# Allegro board RPI-PICO-R3a-PUBLIC.brd
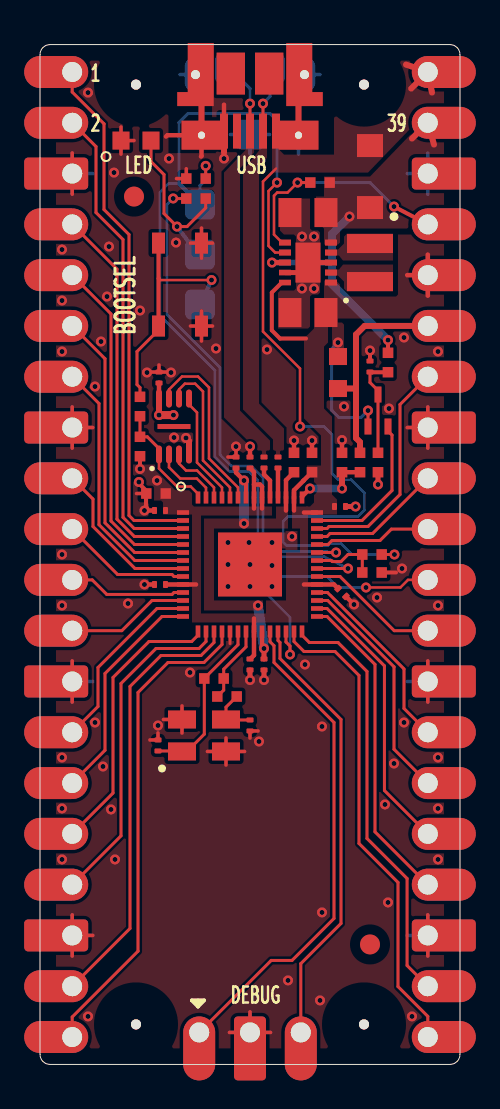
[diagram p0: board, top side]
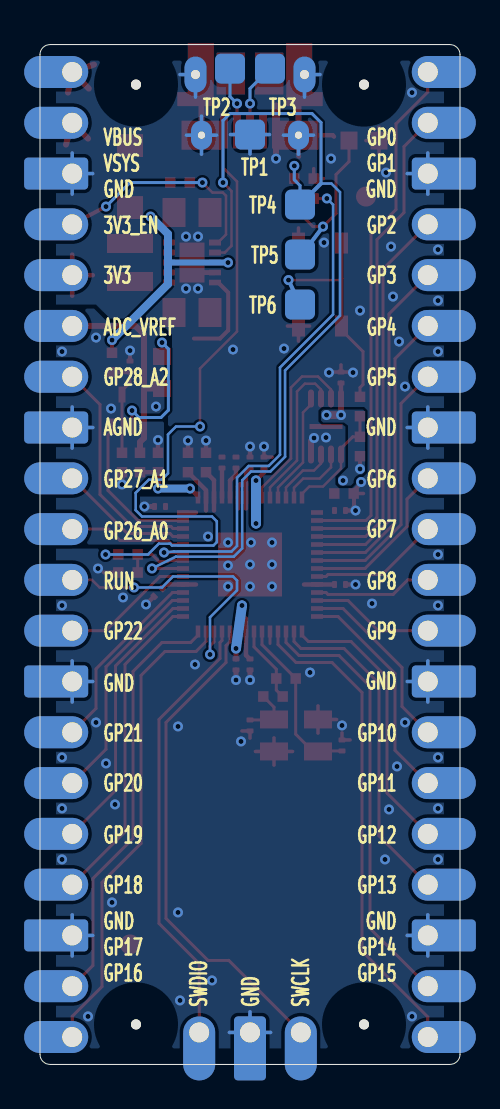
[diagram p1: board, bottom side, seen from below]

Outline 21 x 51 mm; copper layers: TOP, BOTTOM. Coordinates in mm from the lower left corner of the outline.
Outline path: 0,50.5 0,0.5 arc(0.15,0.15) 0.5,0 20.5,0 arc(20.85,0.15) 21,0.5 21,50.5 arc(20.85,50.85) 20.5,51 0.5,51 arc(0.15,50.85) 0,50.5

## Design rules (mm)
constraint set DEFAULT: min track width 0.127

## Placement (name value [footprint] x y rotation side)
C1  47u  [CAPC2012]  13.4 42.6 180 top
C2  47u  [CAPC2012]  13.4 37.6 180 top
C3  1n  [M0603_PICO]  16.5 34.9 90 top
C4  100n  [M0603_PICO]  6 27.7 180 top
C5  100n  [M0603_PICO]  6 24 180 top
C6  100n  [M0603_PICO]  15.1 23.6 315 top
C7  100n  [M0603_PICO]  15 27.9 0 top
C8  100n  [M0603_PICO]  10.5 20 270 top
C9  100n  [M0603_PICO]  11.2 20 270 top
C10  100n  [M0603_PICO]  10.5 30.1 90 top
C11  100n  [M0603_PICO]  9.8 30.1 90 top
C12  2u2  [CAPC1005]  12.7 30.1 90 top
C13  2u2  [CAPC1005]  15.1 30.1 90 top
C14  2u2  [CAPC1005]  13.6 30.1 90 top
C15  100n  [M0603_PICO]  5.95 34.35 90 top
C16  15p  [M0603_PICO]  5.9 15.95 90 top
C17  15p  [M0603_PICO]  10.5 16.95 270 top
C18  2u2  [CAPC1005]  5.8 28.55 180 top
D1  MBR120VLSFT1G  [SOD123FL]  16.5 44.4 90 top
D2  Green  [AVAGO_QSM]  4.8 46.2 0 top
J0  -  [CON_PICO_40W]  10.5 25.5 0 top
J1  690-005-298-486  [FCI_10103594-0001LF]  10.5 49.5 180 top
J2  -  [CON_PICO_3W]  10.5 1.6 0 top
L1  2u2  [BOURNS_SRN2512]  16.5 40.1 270 top
NOREF  -  []  1.61 1.37 90 top
NOREF#2  -  []  10.5 0 90 top
NOREF#3  -  []  12.9 51 90 top
NOREF#4  -  []  2.32 7.21 0 top
NOREF#5  -  [unnamed#2]  16.2 49 0 top
NOREF#6  -  []  10.5 0 90 top
NOREF#7  -  []  0 0 90 top
NOREF#8  -  []  1.61 49.63 0 top
NOREF#9  -  [unnamed#2]  4.8 2 0 top
NOREF#10  -  [unnamed#2]  16.2 2 0 top
NOREF#11  -  []  2.21 14.6 0 top
NOREF#12  -  []  -0.79 3.11 90 top
NOREF#13  -  []  -0.79 0.57 0 top
NOREF#14  -  []  -0.79 0.57 0 top
NOREF#15  -  []  64 31 0 top
NOREF#16  -  []  0 50.5 0 top
NOREF#17  -  []  -0.79 0.57 90 top
NOREF#18  -  []  65 0 0 top
NOREF#19  -  []  -0.79 2.17 90 top
NOREF#20  -  [unnamed#3]  4.7 43.4 0.1 top
NOREF#21  -  []  7.16 1.57 0 top
NOREF#22  -  []  -15 87 0 top
NOREF#23  -  []  14.3 2 0 top
NOREF#24  -  []  15.2 49 90 top
NOREF#25  -  [unnamed#2]  4.8 49 0 top
NOREF#26  -  []  7.16 -0.8 90 top
NOREF#27  -  []  19.89 34.39 0 top
NOREF#28  -  [unnamed#3]  16.5 6 0.1 top
NOREF#29  -  []  0 1.35 0 top
NOREF#30  -  []  0.55 0 90 top
NOREF#31  -  []  16.2 3.05 0 top
NOREF#32  -  []  0 2 0 top
NOREF#33  -  []  19 18.35 90 top
NOREF#34  -  []  -15 139 0 top
NOREF#35  -  []  2.41 3.91 0 top
NOREF#36  -  []  21.49 39.47 0 top
NOREF#37  -  []  6.5 51.1 0 top
NOREF#38  -  []  4.8 0 0 top
NOREF#39  -  []  1.61 34.39 90 top
NOREF#40  -  []  4.8 49 0 top
Q1  DMG1012T  [SOT50P160X90-3N]  16.9 32.7 90 top
R1  10K  [RESC1005]  16.6 24.6 0 top
R2  100K  [RESC1005]  14 44.1 180 top
R3  470R  [RESC1005]  7.8 43.3 0 top
R4  NO-FIT  [RESC1005]  5 30.9 90 top
R5  200K  [RESC1005]  17.4 35.1 270 top
R6  100K  [RESC1005]  16.9 30.1 270 top
R7  200R  [RESC1608]  14.9 34.6 270 top
R8  100K  [RESC1005]  7.8 44.3 180 top
R9  1R  [RESC1005]  16 30.1 270 top
R10  5K6  [RESC1005]  16.6 25.5 180 top
R11  1K  [RESC1005]  5 32.9 270 top
R12  27R  [M0603_PICO]  11.2 30.1 270 top
R13  27R  [M0603_PICO]  11.9 30.1 270 top
R14  1K  [RESC1005]  9.35 18.4 0 top
R15  NO-FIT  [RESC1005]  8.7 19.3 0 top
SW1  TP-1221U-K9K5325  [TONEPARTS_TP-1221U-K9K5325]  7 39 90 top
TP1  SQ1P5MM  [TP_SMT_1P5X1P5MM]  10.5 46.5 180 bottom
TP2  SQ1P5MM  [TP_SMT_1P5X1P5MM]  11.5 49.8 180 bottom
TP3  SQ1P5MM  [TP_SMT_1P5X1P5MM]  9.5 49.8 180 bottom
TP4  SQ1P5MM  [TP_SMT_1P5X1P5MM]  8 43 180 bottom
TP5  SQ1P5MM  [TP_SMT_1P5X1P5MM]  8 40.5 180 bottom
TP6  SQ1P5MM  [TP_SMT_1P5X1P5MM]  8 38 180 bottom
U1  RP2040  [RPI_RP2040]  10.5 25 0 top
U2  RT6150B-33GQW  [RICHTEK_RT6150B]  13.4 40.1 180 top
U3  W25Q16JVUXIQ  [USON_2X3MM]  6.7 31.9 90 top
X1  12MHz  [XTAL320X250X100]  8.2 16.45 0 top

## Library data of the parts
C1-C18 = CAP_MLCC
D1 = DIODE_SCHOTTKY
D2 = LED_2PIN
J0 = CON_PICO_40W
J1 = CON_uUSB_B
J2 = CON_PICO_3W
L1 = INDUCTOR
Q1 = MOSFET_N
R1-R15 = RES_CHIP
SW1 = SW_PB_4PIN
TP1-TP6 = TP_SMT_SQUARERC_1P5MM
U1 = RPI_RP2040
U2 = RICHTEK_RT6150
U3 = WINBOND_W25X_QSPI_FLASH_USON
X1 = CRYSTAL_4P

## Footprints (pads in the part's own frame, mm; a bottom-side part is the same pattern mirrored in y, then rotated)
AVAGO_QSM
  rect 0.85x0.9 smd: 1(-0.75,0) 2(0.75,0)
BOURNS_SRN2512
  rect 0.95x2.3 smd: 1(-0.95,0) 2(0.95,0)
CAPC1005
  rect 0.52x0.53 smd: 1(-0.485,0) 2(0.485,0)
CAPC2012
  rect 1.15x1.45 smd: 1(-0.9,0) 2(0.9,0)
CON_PICO_3W
  oval 1.6x3.2 hole 1: 1(-2.54,0) 3(2.54,0)
  rrect 1.6x3.2 hole 1: 2(0,0)
CON_PICO_40W
  oval 3.2x1.6 hole 1: 1(-8.89,24.13) 2(-8.89,21.59) 4(-8.89,16.51) 5(-8.89,13.97) 6(-8.89,11.43) 7(-8.89,8.89) 9(-8.89,3.81) 10(-8.89,1.27) 11(-8.89,-1.27) 12(-8.89,-3.81) 14(-8.89,-8.89) 15(-8.89,-11.43) 16(-8.89,-13.97) 17(-8.89,-16.51) 19(-8.89,-21.59) 20(-8.89,-24.13) 21(8.89,-24.13) 22(8.89,-21.59) 24(8.89,-16.51) 25(8.89,-13.97) 26(8.89,-11.43) 27(8.89,-8.89) 29(8.89,-3.81) 30(8.89,-1.27) 31(8.89,1.27) 32(8.89,3.81) 34(8.89,8.89) 35(8.89,11.43) 36(8.89,13.97) 37(8.89,16.51) 39(8.89,21.59) 40(8.89,24.13)
  rrect 3.2x1.6 hole 1: 3(-8.89,19.05) 8(-8.89,6.35) 13(-8.89,-6.35) 18(-8.89,-19.05) 23(8.89,-19.05) 28(8.89,-6.35) 33(8.89,6.35) 38(8.89,19.05)
FCI_10103594-0001LF
  rect 1.42x2.1 smd: (-0.96,-0.05) (0.96,-0.05)
  rect 0.4x1.75 smd: 1(-1.3,2.825) 2(-0.65,2.825) 3(0,2.825) 4(0.65,2.825) 5(1.3,2.825)
  custom 2x1.45 hole 1.05x0.65: 6(-2.425,3.03) 8(2.425,3.03)
  custom 1.825x3.15 hole 0.7x1.4: 7(-2.725,0) 9(2.725,0)
M0603_PICO
  rrect 0.25x0.35 smd: 1(-0.275,0) 2(0.275,0)
RESC1005
  rect 0.52x0.53 smd: 1(-0.485,0) 2(0.485,0)
RESC1608
  rect 0.85x0.9 smd: 1(-0.8,0) 2(0.8,0)
RICHTEK_RT6150B
  rect 0.6x0.3 smd: 1(-1.15,1) 2(-1.15,0.5) 3(-1.15,0) 4(-1.15,-0.5) 5(-1.15,-1) 6(1.15,-1) 7(1.15,-0.5) 8(1.15,0)
  rect 0.6x0.28 smd: 9(1.15,0.5) 10(1.15,1)
  rect 1.25x2 smd: 11(0,0)
RPI_RP2040
  rect 0.6x0.23 smd: 1(-3.35,2.6) 2(-3.35,2.2) 3(-3.35,1.8) 4(-3.35,1.4) 5(-3.35,1) 6(-3.35,0.6) 7(-3.35,0.2) 8(-3.35,-0.2) 9(-3.35,-0.6) 10(-3.35,-1) 11(-3.35,-1.4) 12(-3.35,-1.8) 13(-3.35,-2.2) 14(-3.35,-2.6) 29(3.35,-2.6) 30(3.35,-2.2) 31(3.35,-1.8) 32(3.35,-1.4) 33(3.35,-1) 34(3.35,-0.6) 35(3.35,-0.2) 36(3.35,0.2) 37(3.35,0.6) 38(3.35,1) 39(3.35,1.4) 40(3.35,1.8) 41(3.35,2.2) 42(3.35,2.6)
  rect 0.23x0.6 smd: 15(-2.6,-3.35) 16(-2.2,-3.35) 17(-1.8,-3.35) 18(-1.4,-3.35) 19(-1,-3.35) 20(-0.6,-3.35) 21(-0.2,-3.35) 22(0.2,-3.35) 23(0.6,-3.35) 24(1,-3.35) 25(1.4,-3.35) 26(1.8,-3.35) 27(2.2,-3.35) 28(2.6,-3.35) 43(2.6,3.35) 44(2.2,3.35) 45(1.8,3.35) 46(1.4,3.35) 47(1,3.35) 48(0.6,3.35) 49(0.2,3.35) 50(-0.2,3.35) 51(-0.6,3.35) 52(-1,3.35) 53(-1.4,3.35) 54(-1.8,3.35) 55(-2.2,3.35) 56(-2.6,3.35)
  rect 3.2x3.2 smd: 57(0,0)
SOD123FL
  rect 1.15x1.3 smd: 1(-1.55,0) 2(1.55,0)
SOT50P160X90-3N
  rect 0.8x0.35 smd: 1(-0.8,0.5) 2(-0.8,-0.5) 3(0.8,0)
TONEPARTS_TP-1221U-K9K5325
  rect 1.05x0.65 smd: 1(-2.075,1.075) 2(2.075,1.075) 3(-2.075,-1.075) 4(2.075,-1.075)
TP_SMT_1P5X1P5MM
  rrect 1.5x1.5 smd: 1(0,0)
unnamed#2
  round 0.5 hole 2.1 unplated: (0,0)
unnamed#3
  round 1 smd: (0,0)
USON_2X3MM
  oval 0.9x0.3 smd: 1(-1.4,0.75) 2(-1.4,0.25) 3(-1.4,-0.25) 4(-1.4,-0.75) 5(1.4,-0.75) 6(1.4,-0.25) 7(1.4,0.25) 8(1.4,0.75)
  rect 0.25x1.65 smd: 9(0,0)
XTAL320X250X100
  rect 1.4x0.9 smd: 1(-1.1,-0.8) 2(1.1,-0.8) 3(1.1,0.8) 4(-1.1,0.8)

## Nets
1V1: C9.1 C11.1 C12.1 U1.23 U1.45 U1.50
3V3: C2.1 C4.1 C5.1 C6.1 C7.1 C8.1 C10.1 C14.1 C15.1 C18.1 J0.36 Q1.1 R4.1 R7.1 U1.1 U1.10 U1.22 U1.33 U1.42 U1.44 U1.48 U1.49 U2.1(VOUT) U2.10 U3.8
3V3_EN: J0.37 R2.2 U2.6
GND: C1.2 C2.2 C3.2 C4.2 C5.2 C6.2 C7.2 C8.2 C9.2 C10.2 C11.2 C12.2 C13.2 C14.2 C15.2 C16.2 C17.2 C18.2 D2.1(CATHODE) J0.3 J0.8 J0.13 J0.18 J0.23 J0.28 J0.33 J0.38 J1.5 J1.6 J1.7 J1.8 J1.9(SH4) J2.2 R1.2 R6.2 R8.2 SW1.3 SW1.4(P4) TP1.1 U1.19 U1.57 U2.3 U2.9 U2.11 U3.4 X1.2 X1.4(GND2)
VBUS: D1.2 J0.40 J1.1 R10.1
ADC_AVDD: C13.1 R9.2 U1.43
ADC_VREF: J0.35 R7.2 R9.1
GPIO0: J0.1 U1.2
GPIO1: J0.2 U1.3
GPIO2: J0.4 U1.4
GPIO3: J0.5 U1.5
GPIO4: J0.6 U1.6
GPIO5: J0.7 U1.7
GPIO6: J0.9(P9) U1.8
GPIO7: J0.10 U1.9
GPIO8: J0.11 U1.11
GPIO9: J0.12 U1.12
GPIO10: J0.14 U1.13
GPIO11: J0.15 U1.14
GPIO12: J0.16 U1.15
GPIO13: J0.17 U1.16
GPIO14: J0.19 U1.17
GPIO15: J0.20 U1.18
GPIO16: J0.21 U1.27
GPIO17: J0.22 U1.28
GPIO18: J0.24 U1.29
GPIO19: J0.25 U1.30
GPIO20: J0.26 U1.31
GPIO21: J0.27 U1.32
GPIO22: J0.29 U1.34
GPIO23: R8.1 TP4.1 U1.35 U2.7
GPIO24: R1.1 R10.2 U1.36
GPIO25: R3.1 U1.37
GPIO26_ADC0: J0.31 U1.38
GPIO27_ADC1: J0.32 U1.39
GPIO28_ADC2: J0.34 U1.40
GPIO29_ADC3: Q1.2(S) U1.41
QSPI_SCLK: U1.52 U3.6
QSPI_SD0: U1.53 U3.5
QSPI_SD1: U1.55 U3.2
QSPI_SD2: U1.54 U3.3(W\P\_IO2)
QSPI_SD3: U1.51 U3.7
QSPI_SS: R4.2 R11.2 U1.56 U3.1
RUN: J0.30 U1.26
SWCLK: J2.1 U1.24
SWDIO: J2.3(P3) U1.25
USB_DM: J1.2 R13.1 TP2.1
USB_DMX: R13.2 U1.46
USB_DP: J1.3 R12.1 TP3.1
USB_DPX: R12.2 U1.47
VSYS: C1.1 D1.1(K) J0.39 R2.1 R5.1 U2.5 U2.8
XIN: C16.1 R15.1 U1.20 X1.1
XOUT: R14.1 R15.2 U1.21(XOUT)
XR: C17.1 R14.2 X1.3
N1248345: L1.1 U2.4
N1248352: L1.2 U2.2
N1283798: D2.2 R3.2 TP5.1
N1286133: C3.1 Q1.3 R5.2 R6.1
N1327876: R11.1 SW1.1 SW1.2 TP6.1

Pads without a net: J1 4; U3 9

## Via types
v1: diameter 0.5, hole 0.25, TOP to BOTTOM, 111 vias

## Routing (per net, layer and track width the routed paths; a pad name or vN(x,y) marks a point on that pad's centre or on a via; arc(x,y) is an arc through that point)
1V1: length 9.5
  TOP w0.2: v1(10.2,29.2) 10.3,29.1 U1.50 ; 11.1,20.9 v1(11.2,20.8)
  TOP w0.22: C12.1 12.3,29.21 U1.45 12.3,27.7 ; U1.23 11.1,20.9 ; 9.8,29.82 9.8,29.6 v1(10.2,29.2)
  TOP w0.25: C9.1 v1(11.2,20.8)
  BOTTOM w0.5: v1(10.9,22.95) v1(11.2,20.8) ; v1(10.2,29.2) v1(10.2,27.05)
3V3: length 29.1
  TOP w0.15: Q1.1 v1(16.4,32.7)
  TOP w0.2: U2.10 12.09,39.1 11.59,38.6 11.59,36.71 12,36.3 13.3,36.3 ; R4.1 v1(5,29.78)
  TOP w0.22: 11.1,27.8 U1.48 11.1,28.9 11,29 10.7,29 ; 10.7,22.3 U1.22 10.7,20.46 10.51,20.27 C8.1 ; C14.1 13.6,29.61 13.17,29.19 13.17,29.18 12.7,28.71 U1.44 12.7,27.7 ; 10.5,29.82 10.7,29.62 10.7,29 ; 7.8,24 U1.10 C5.1 ; 10.7,29 U1.49 10.7,27.8 ; C6.1 14.7,24 U1.33 13.2,24 ; U1.42 13.2,27.6 ; U3.8 C15.1 5.95,34.09
  TOP w0.227: J0.36 19.39,40.5 ; J0.36 19.39,38.44 ; J0.36 18.36,39.47
  TOP w0.3: U3.8 v1(5.95,32.47)
  TOP w0.4: v1(5.95,32.47) v1(6.67,32.47)
  BOTTOM w0.15: v1(14.9,36.1) 14.58,35.78 14.58,32.72 14.95,32.35 16.05,32.35 v1(16.4,32.7)
  vias: v1(5.85,29.2)
3V3_EN: length 12
  TOP w0.127: v1(12.88,44.1) 12.38,43.6 11.86,43.6 11.7,43.44 11.7,41.5 12.1,41.1 U2.6
  TOP w0.15: v1(12.88,44.1) R2.2
  TOP w0.2: v1(17.7,42.9) J0.37
  BOTTOM w0.15: v1(12.88,44.1) 16.5,44.1 v1(17.7,42.9)
GND: length 104.6
  TOP w0.15: U1.19 9.5,21.05
  TOP w0.177: X1.4 7.1,17.93 ; X1.4 7.1,16.57 ; X1.4 6.17,17.25 ; 1.61,20.18 J0.13 1.61,18.12 ; X1.2 10.23,15.65 ; X1.2 8.37,15.65 ; X1.2 9.3,14.97 ; X1.2 9.3,16.33 ; J0.18 2.64,6.45 ; J0.18 1.61,7.48 ; J0.18 1.61,5.42 ; J2.2 10.5,2.63 ; J2.2 9.47,1.6 ; J2.2 11.53,1.6 ; J0.33 19.39,32.88 ; J0.33 18.36,31.85 ; J0.33 19.39,30.82 ; D2.1 4.05,46.88 ; D2.1 4.7,46.2 ; D2.1 4.05,45.52 ; 19.39,18.12 J0.28 19.39,20.18 ; C15.2 5.95,34.98 ; C15.2 5.55,34.62 ; C15.2 6.35,34.62 ; 10.5,16.32 C17.2 10.9,16.68 ; SW1.4 8.07,41.83 ; SW1.4 7.52,41.08 ; SW1.4 8.63,41.08 ; SW1.4 8.07,40.32 ; J0.8 1.61,32.88 ; J0.8 2.64,31.85 ; J0.8 1.61,30.82 ; 5.5,16.23 5.9,16.23 5.9,16.58 ; 9.8,30.73 C11.2 9.4,30.38 ; 7.32,44.79 7.32,44.3 6.83,44.3 ; 5.32,28.06 5.32,28.55 4.83,28.55 ; 8.07,36.17 SW1.3 ; SW1.3 8.07,37.68 ; SW1.3 7.52,36.92 ; SW1.3 8.63,36.92 ; 19.39,5.42 J0.23 19.39,7.48 ; 1.61,45.58 J0.3 1.61,43.52
  TOP w0.2: 5.3,27.81 5.3,28.54 5.32,28.55 5.32,28.68 4.95,29.05 4.95,29.12 v1(4.95,29.13) ; 17.8,24.6 R1.2 ; C3.2 16.5,35.6
  TOP w0.22: 8.05,45.4 8.07,45.42 J1.8 6.37,46.47 6.3,46.4 ; C10.2 10.5,30.8 ; C13.2 v1(15.1,31.22) ; C12.2 v1(12.7,31.2) ; C14.2 v1(13.6,31.2) ; C6.2 15.6,23.1 ; C5.2 v1(5.22,24) ; C4.2 v1(5.22,27.7) ; J1.5 9.2,48
  TOP w0.25: U2.9 12.9,39.6 U2.11 U2.3 ; R6.2 v1(16.9,29) ; C9.2 v1(11.2,19.22) ; C8.2 v1(10.5,19.22) ; C7.2 v1(15.78,27.9)
  TOP w0.3: 13.04,46.59 J1.6 12.93,49.2 J1.7 ; v1(7.3,31.33) 7.45,31.18 U3.4 ; v1(5.22,27.7) 5.32,27.79 5.3,27.81 ; 9.2,45.6 J1.5 8.28,46.67 J1.8 8.07,49.2 J1.9
  BOTTOM w0.177: J0.18 1.61,7.48 ; J0.18 2.64,6.45 ; J0.18 1.61,5.42 ; 18.36,19.15 J0.28 ; J0.28 19.39,20.18 ; J0.28 19.39,18.12 ; J0.33 19.39,32.88 ; J0.33 19.39,30.82 ; J0.33 18.36,31.85 ; J1.8 8.83,46.47 ; J1.8 8.07,45.52 ; J1.8 7.32,46.47 ; 19.39,43.52 J0.38 ; J0.38 18.36,44.55 ; J0.38 19.39,45.58 ; TP1.1 11.48,46.5 ; TP1.1 9.52,46.5 ; TP1.1 10.5,45.52 ; 19.39,5.42 J0.23 ; J0.23 18.36,6.45 ; J0.23 19.39,7.48 ; 12.93,45.52 J1.6 ; J1.6 13.68,46.47 ; J1.6 12.17,46.47 ; J1.6 12.93,47.42 ; 13.22,48.37 J1.7 14,49.5 ; J0.3 2.64,44.55 ; J0.3 1.61,45.58 ; J0.3 1.61,43.52 ; J0.8 1.61,32.88 ; J0.8 2.64,31.85 ; J0.8 1.61,30.82 ; J2.2 10.5,2.63 ; J2.2 11.53,1.6 ; J2.2 9.47,1.6 ; 7,49.5 J1.9 7.78,48.37 ; J0.13 1.61,20.18 ; J0.13 2.64,19.15 ; J0.13 1.61,18.12
  vias: v1(1.1,40.75) v1(1.1,38.2) v1(1.1,35.65) v1(1.1,25.5) v1(1.1,22.95) v1(1.1,15.35) v1(1.1,12.8) v1(1.1,10.25) v1(2.4,48.6) v1(2.4,2.4) v1(2.75,33.9) v1(2.75,17.1) v1(3.05,36.15) v1(3.15,14.9) v1(3.35,38.4) v1(3.45,40.9) v1(3.55,12.75) v1(3.7,44.6) v1(3.75,10.25) v1(4.4,23.05) v1(5,37.7) v1(5.35,34.6) v1(5.9,16.95) v1(6.45,45.3) v1(6.55,34.6) v1(6.7,31.35) v1(6.8,41.1) v1(7.5,19.6) v1(8.8,35.8) v1(9.2,45.3) v1(9.4,26.1) v1(9.4,25) v1(9.4,23.9) v1(9.8,30.9) v1(10.45,26.1) v1(10.5,30.9) v1(10.5,25) v1(10.5,23.9) v1(10.95,16.15) v1(11.35,35.75) v1(11.6,26.1) v1(11.6,24.95) v1(11.6,23.9) v1(12.4,4.2) v1(12.6,26.4) v1(13.1,41.4) v1(13.1,38.8) v1(13.25,20) v1(13.7,41.4) v1(13.7,38.8) v1(14,3.2) v1(14.1,16.9) v1(14.1,7.6) v1(15.2,32.9) v1(15.7,23) v1(16.5,35.7) v1(16.85,23.35) v1(17.25,13) v1(17.45,32.8) v1(17.4,8.1) v1(17.7,15.05) v1(18.1,24.8) v1(18.2,36.35) v1(18.2,17.1) v1(18.6,2.4) v1(19.9,35.65) v1(19.9,22.95) v1(19.9,15.35) v1(19.9,12.8) v1(19.9,10.25)
VBUS: length 35.8
  TOP w0.127: v1(13,31.9) 13,34.8 11.15,36.65 11.15,44.15 11.8,44.8
  TOP w0.15: v1(17.72,25.5) R10.1
  TOP w0.3: 18.56,48.8 J0.40 ; J0.40 18.3,50 ; J0.40 19.6,48.6
  BOTTOM w0.127: v1(13,31.9) 14.2,31.9 14.6,31.5 14.6,29.56 14.92,29.24 15.56,29.24 16.22,28.58 16.22,27.72 15.9,27.4 12.4,27.4 12.16,27.16 12.16,26.12 12.33,25.95 14.4,25.95 14.49,26.04 15.06,26.04 15.6,25.5 v1(17.72,25.5)
ADC_AVDD: length 3.9
  TOP w0.22: C13.1 R9.2 ; U1.43 13.1,28.4 v1(13.5,28.8)
  TOP w0.3: v1(15.1,28.8) C13.1
  BOTTOM w0.4: v1(13.5,28.8) v1(15.1,28.8)
ADC_VREF: length 10.7
  TOP w0.3: 15.8,33.8 15.8,31.32 16,31.12 R9.1 ; 15.8,33.8 R7.2 ; 15.8,33.8 15.8,36.5 16.23,36.93 J0.35
GPIO0: length 26.2
  TOP w0.15: J0.1 1.61,48.63 3.2,47.04 3.2,42.75 4.45,41.5 4.45,27.45 4.7,27.2 U1.2
GPIO1: length 24
  TOP w0.15: J0.2 2.8,45.9 2.8,42.6 4.15,41.25 4.15,27.36 4.71,26.8 U1.3
GPIO2: length 19.3
  TOP w0.15: J0.4 3.85,39.77 3.85,27.27 4.72,26.4 U1.4
GPIO3: length 17.2
  TOP w0.15: U1.5 4.72,26 3.55,27.17 3.55,37.53 J0.5
GPIO4: length 15
  TOP w0.15: J0.6 3.25,35.29 3.25,27.08 4.73,25.6 U1.6
GPIO5: length 12.9
  TOP w0.15: J0.7 2.95,33.05 2.95,26.99 4.74,25.2 U1.7
GPIO6: length 8.2
  TOP w0.15: J0.9 2.65,28.27 2.65,26.9 4.75,24.8 U1.8
GPIO7: length 6.5
  TOP w0.15: U1.9 6.7,24.4 6.6,24.5 3.88,24.5 J0.10
GPIO8: length 5.9
  TOP w0.15: J0.11 2.61,24.23 3.34,23.5 6.6,23.5 6.7,23.6 U1.11
GPIO9: length 6.2
  TOP w0.15: J0.12 4.09,21.69 5.6,23.2 U1.12
GPIO10: length 9.2
  TOP w0.15: U1.13 5.85,22.8 2.9,19.85 2.9,17.9 J0.14
GPIO11: length 11.2
  TOP w0.15: U1.14 6.1,22.4 3.25,19.55 3.25,15.71 J0.15
GPIO12: length 14
  TOP w0.15: J0.16 3.65,13.57 3.65,19.35 5.45,21.15 7.58,21.15 7.9,21.46 U1.15
GPIO13: length 16.7
  TOP w0.15: U1.16 8.3,21.15 7.95,20.8 5.8,20.8 4.05,19.05 4.05,11.43 J0.17
GPIO14: length 21.8
  TOP w0.15: U1.17 8.7,21.1 8.05,20.45 6.05,20.45 4.5,18.9 4.5,6.8 J0.19
GPIO15: length 24.4
  TOP w0.15: J0.20 1.61,2.37 4.9,5.66 4.9,18.6 6.4,20.1 8.2,20.1 9.1,21 U1.18
GPIO16: length 24
  TOP w0.15: J0.21 19.39,2.4 17.9,3.89 17.9,9.1 15.95,11.05 15.95,19.45 14.75,20.65 13.2,20.65 12.7,21.15 U1.27
GPIO17: length 21.2
  TOP w0.15: J0.22 18.35,4.95 18.35,9.3 16.35,11.3 16.35,19.65 14.9,21.1 13.46,21.1 13.1,21.46 U1.28
GPIO18: length 16
  TOP w0.15: U1.29 14.35,22.4 16.75,20 16.75,11.63 J0.24
GPIO19: length 13.9
  TOP w0.15: J0.25 17.22,13.7 17.22,19.93 14.35,22.8 U1.30
GPIO20: length 11.7
  TOP w0.15: J0.26 17.7,15.76 17.7,19.88 14.38,23.2 U1.31
GPIO21: length 9.6
  TOP w0.15: U1.32 14.38,23.6 18.2,19.78 18.2,17.8 J0.27
GPIO22: length 6.7
  TOP w0.15: J0.29 17.71,21.69 15,24.4 U1.34
GPIO23: length 47.8
  TOP w0.127: U2.7 11.76,40.6 11.43,40.93 11.43,43.67 v1(11.85,44.1)
  TOP w0.15: R8.1 v1(8.29,44.94) ; U1.35 v1(15.4,24.8)
  BOTTOM w0.127: v1(15.4,24.8) 14.21,25.39 11.31,25.39 10.89,25.81 10.89,29.21 10.45,29.65 9.48,29.65 8.75,30.39 8.75,34.7 6,37.45 6,43.62 6.43,44.05 6.95,44.05
  BOTTOM w0.15: TP4.1 8,43.95 8.29,44.24 v1(8.29,44.94) ; 6.95,44.05 6.95,47.1 7.4,47.55 11.5,47.55 11.85,47.2 v1(11.85,44.1)
  BOTTOM w0.2: 6.95,44.05 TP4.1
GPIO24: length 3.3
  TOP w0.15: 16.11,24.6 16.11,25.5 15.4,25.5 15.05,25.15 14.61,25.15 14.56,25.2 U1.36
GPIO25: length 25.5
  TOP w0.15: v1(6.66,43.3) 6.8,43.3 6.8,43.3 7.32,43.3 ; U1.37 v1(14.8,25.6)
  BOTTOM w0.127: v1(6.66,43.3) 6.35,42.99 6.35,37.5 9,34.85 9,30.49 9.56,29.93 10.56,29.93 11.15,29.34 11.15,25.93 11.43,25.65 14.31,25.65 v1(14.8,25.6)
GPIO26_ADC0: length 5.9
  TOP w0.15: U1.38 14.4,26 14.6,26.2 17,26.2 17.57,26.77 J0.31
GPIO27_ADC1: length 6.7
  TOP w0.15: U1.39 14.35,26.4 14.5,26.55 16.63,26.55 J0.32
GPIO28_ADC2: length 11.3
  TOP w0.15: J0.34 18,33 18,28.5 16.4,26.9 14.45,26.9 14.35,26.8 U1.40
GPIO29_ADC3: length 7.7
  TOP w0.15: U1.41 16.1,27.2 17.6,28.7 17.6,31.48 17.4,31.68 Q1.2
QSPI_SCLK: length 7.8
  TOP w0.127: U1.52 9.5,28.85 8.15,30.2 8.15,33.65 7.76,34.04 7.24,34.04 6.95,33.75 U3.6
QSPI_SD0: length 5.6
  TOP w0.127: U1.53 9.1,28.85 7.85,30.1 7.85,32.6 7.45,33 U3.5
QSPI_SD1: length 3.4
  TOP w0.127: U3.2 6.45,29.86 7.01,29.3 7.84,29.3 8.3,28.84 U1.55
QSPI_SD2: length 3.2
  TOP w0.127: U1.54 8.7,28.85 7.85,29.7 7.3,29.7 6.95,30.05 U3.3
QSPI_SD3: length 9
  TOP w0.127: U1.51 9.9,28.85 8.45,30.3 8.45,33.85 7.9,34.4 7.1,34.4 6.45,33.75 U3.7
QSPI_SS: length 5.9
  TOP w0.127: U1.56 7.9,28.54 7.54,28.9 6.85,28.9 5.95,29.8 U3.1
  TOP w0.15: U3.1 5.95,30.8 5.37,31.39 R4.2 R11.2
RUN: length 14.2
  TOP w0.127: v1(16.3,23.85) 18.02,23.85 18.4,24.23 J0.30
  TOP w0.15: v1(12.5,20.5) 12.5,20.92 12.3,21.12 U1.26
  BOTTOM w0.127: v1(12.5,20.5) 12.5,22.36 11.15,23.71 11.15,24.2 11.35,24.4 14.35,24.4 14.9,23.85 v1(16.3,23.85)
SWCLK: length 24.8
  TOP w0.15: U1.24 11.5,21.14 11.7,20.94 11.7,20.1 14.7,17.1 14.7,7.3 12.6,5.2 11.56,5.2 J2.1
SWDIO: length 22.2
  TOP w0.15: U1.25 11.9,21.2 12,21.1 12,20.3 15.05,17.25 15.05,7.05 13.04,5.04 J2.3
USB_DM: length 3.3
  TOP w0.15: v1(11.15,48.05) J1.2
  BOTTOM w0.15: TP2.1 11.5,48.4 v1(11.15,48.05)
USB_DMX: length 1.5
  TOP w0.22: U1.46 11.9,29.82
USB_DP: length 3.5
  TOP w0.15: J1.3 v1(10.5,48.05)
  BOTTOM w0.15: TP3.1 10.5,48.8 v1(10.5,48.05)
USB_DPX: length 1.6
  TOP w0.22: U1.47 11.5,29.2 11.2,29.5 11.2,29.82
VSYS: length 14.2
  TOP w0.2: v1(17.4,36.22) R5.1
  TOP w0.25: v1(11.6,40.1) U2.8
  TOP w0.3: 19.7,46 J0.39 18.6,46.3
  BOTTOM w0.3: v1(11.6,40.1) 14.6,40.1
  BOTTOM w0.4: v1(15.47,42.4) 14.6,41.53 14.6,39.02 v1(17.4,36.22)
XIN: length 8.5
  TOP w0.15: 5.9,15.68 7.08,15.68 X1.1 7.35,15.65 8.21,16.52 R15.1 8.21,19.3 9.9,20.99 U1.20
XOUT: length 3.8
  TOP w0.15: U1.21 10.3,20.88 9.19,19.77 R15.2 9.19,18.72 8.87,18.4 R14.1
XR: length 2.6
  TOP w0.15: C17.1 9.32,17.23 X1.3 9.3,17.87 9.84,18.4 9.84,18.4
N1283798: length 8.9
  TOP w0.15: D2.2 5.55,45.15 6.2,44.5 6.2,42.55 v1(6.85,41.9) 7.35,41.9 8.29,42.83 R3.2
  BOTTOM w0.2: TP5.1 7.6,40.9 v1(6.85,41.9)
N1286133: length 5.1
  TOP w0.15: R6.1 Q1.3 16.9,33.7 16.5,34.1 C3.1 16.5,34.64
  TOP w0.2: 16.5,34.64 16.52,34.62 R5.2
N1327876: length 12.2
  TOP w0.127: v1(8.57,39.23) 6,39.23 5.92,39.3
  TOP w0.15: R11.1 5,33.85 4.85,34 4.85,35.65 5.92,36.73 SW1.1
  TOP w0.2: SW1.1 SW1.2
  BOTTOM w0.2: v1(8.57,39.23) TP6.1

## Copper pours and planes (outline as drawn; the poured copper is in the pictures)
1V1 on TOP: 11.8,27.9 11.8,27.3 8.2,27.3 8.2,22.7 11.15,22.7 11.15,23.2 8.7,23.2 8.7,26.8 12.4,26.8 12.4,27.9
3V3 on TOP: 7.6,22.1 13.4,22.1 13.4,27.9 12.6,27.9 12.6,26.8 13,26.8 13,25.6 12.3,25.6 12.3,23.2 11.3,23.2 11.3,22.55 8.05,22.55 8.05,27.45 11.6,27.45 11.6,27.9 7.7,27.9 7.6,28 7.6,30 4.5,30 4.5,29.65 5.5,28.65 5.5,28.2 6.05,28.2 6.15,28.1 6.15,27.5 7.6,27.5
3V3 on TOP: 14.2,39.2 14.2,38.3 13.7,38.3 13.7,36.8 13.2,36.3 13.2,32.3 14.05,31.45 14.05,29.95 13.35,29.95 13.35,29.35 13.7,29.35 13.7,28.1 13.5,27.9 13.3,27.9 13.3,27.5 14.85,27.5 14.85,28.25 14.6,28.5 14.6,32.4 14.2,32.8 14.2,35.9 14.4,36.1 14.4,36.9 14.6,36.9 14.6,35.05 15.2,35.05 15.2,37 15.1,37.1 14.8,37.1 14.8,37.3 20.2,37.3 20.2,41.5 17.9,41.5 17.9,38.5 17.8,38.4 15.2,38.4 15,38.6 15,39 14.8,39.2
3V3 on BOTTOM: 4.75,32.65 4.75,29.65 5.45,28.95 6,28.95 6.1,29.05 6.1,29.35 5.6,29.85 5.6,31.95 5.8,32.1 6.85,32.1 6.95,32.2 6.95,32.65 6.85,32.75 4.85,32.75
GND on TOP: 12,43.3 12,41.7 12.2,41.5 12.7,41.5 12.8,41.4 12.8,38.8 12.7,38.7 11.9,38.7 11.9,36.8 13.4,36.8 13.5,36.9 13.5,38.4 13.6,38.5 13.9,38.5 14,38.6 14,41.6 13.9,41.7 13.6,41.7 13.5,41.8 13.5,43.3
GND on TOP: 0.8,50.2 11.3,50.2 11.3,37.1 11.4,37 20.2,37 20.2,28.6 19.55,28.32 18.86,28.49 17.6,27.23 17.6,29.5 14.8,29.5 14.8,27 17.6,27 17.6,26.97 18.43,26.97 18.44,27.01 19.18,27.76 20.2,27.5 20.2,0.8 0.8,0.8 ; 14 cut-outs
GND on TOP: 11.5,26.6 11.5,25.8 12.85,25.8 12.85,26.6
GND on BOTTOM: 16,27.3 16.2,27.5 16.2,28.8 14.8,28.8 14.8,32.7 14.6,32.9 14.6,36.4 15.3,37.1 17.6,37.1 18.3,37.8 20.2,37.8 20.2,26 12.35,26 12.35,27.3
GND on BOTTOM: 0.8,50.2 20.2,50.2 20.2,38 18.2,38 17.5,37.3 15.2,37.3 14.4,36.5 14.4,32.8 14.6,32.6 14.6,29.2 13.1,29.2 13.1,28.4 16,28.4 16,27.7 15.8,27.5 12.25,27.5 12.15,27.4 12.15,25.8 20.2,25.8 20.2,0.8 0.8,0.8
VBUS on TOP: 11.6,44.6 16.4,44.6 19,47.3 20.2,47.3 20.2,50.2 14.7,50.2 14.7,45.5 12.2,45.5 12,45.7 12,47.5 11.6,47.5
USB_DM on TOP: 10.15,44.7 10.15,32.75 11.65,31.25 11.65,30.75 11.7,30.7 11.75,30.7 11.8,30.65 11.8,30.3 12,30.3 12,30.65 12.05,30.7 12.15,30.7 12.2,30.75 12.2,31.8 10.95,33.05 10.95,44.85 11.35,45.35 11.35,46.95 10.95,46.95 10.95,45.7
USB_DP on TOP: 9.2,32.35 10.9,30.7 11.05,30.7 11.1,30.65 11.1,30.3 11.3,30.3 11.3,30.65 11.35,30.7 11.45,30.7 11.5,30.75 11.5,31.2 10,32.7 10,44.8 10.7,45.6 10.7,47.55 10.3,47.55 10.3,45.75 9.2,44.6
VSYS on TOP: 13.8,41.9 14.1,41.9 14.2,41.8 14.2,41 14.9,41 15,41.1 15,41.7 15.1,41.8 20.2,41.8 20.2,47.1 19.1,47.1 16.5,44.4 14.2,44.4 14.2,43.4 13.8,43.4
N1248345 on TOP: 14.25,40.75 14.25,40.45 14.95,40.45 15.15,40.2 17.65,40.2 17.65,41.55 15.35,41.55 15.2,41.4 15.2,41.05 14.9,40.75
N1248352 on TOP: 14.25,39.75 14.25,39.45 14.9,39.45 15.2,39.15 15.2,38.8 15.35,38.65 17.65,38.65 17.65,40 15.15,40 14.95,39.75

## Text on the board
BOTTOM: L2 - BOTTOM
Ref Des/Assembly Bottom: BOTTOM ASSEMBLY
Package Geometry/Pastemask Bottom: BOTTOM PASTE
Ref Des/Silkscreen Bottom: VBUS | VSYS | GND | 3V3_EN | 3V3 | ADC_VREF | GP28_A2 | AGND | GP27_A1 | GP26_A0 | RUN | GP22 | GP21 | GP20 | GP19 | GP18 | GP17 | GP16 | GP0 | GP1 | GP2 | GP3 | GP4 | GP5 | GP6 | GP7 | GP8 | GP9 | GP10 | GP11 | GP12 | GP13 | GP14 | GP15 | TP3 | TP5 | TP4 | TP6 | TP1 | TP2 | SWCLK | SWDIO | BOTTOM LEGEND
User.Comments: TOP SOLDER MASK | BOTTOM SOLDER MASK
TOP: L1 - TOP
Ref Des/Assembly Top: TOP ASSEMBLY
Package Geometry/Pastemask Top: TOP PASTE
Ref Des/Silkscreen Top: 1 | 2 | LED | USB | DEBUG | 39 | BOOTSEL | TOP LEGEND
DIMENSION: 2mm ROUTE | (typ)
PINOUT: TP1-6 ARE ON | REVERSE SIDE | TP4 | TP5 | TP6 | TP1 | TP3 | TP2 | 40 | 39 | 38 | 37 | 36 | 35 | 34 | 33 | 32 | 31 | 30 | 29 | 28 | 27 | 26 | 25 | 24 | 23 | 22 | 21 | 1 | 2 | 3 | 4 | 5 | 6 | 7 | 8 | 9 | 10 | 11 | 12 | 13 | 14 | 15 | 16 | 17 | 18 | 19 | 20 | D1 | D2 | D3
SMT_FOOTPRINT: A = (7.775, 49.5) | B = (13.225, 49.5) | C = (8.075, 46.47) | D = (12.925, 46.47) | A | C | D | B | ORIGIN BOTTOM LEFT AS INDICATED | TEST POINT CENTERS SHOWN | TEST POINTS ARE 1.5x1.5mm | WITH 0.3mm CORNER RADIUS | A, B, C, D PAD CENTERS SHOWN | A, B PAD GEOMETRY: | B, C PAD GEOMETRY: | 1.1mm | 1.05mm | 1.8mm | 1.45mm | RADIUS = 0.55mm | RADIUS = 0.525mm | (8,43) | (8,40.5) | (8,38) | (9.5,49.8) | (11.5, 49.8) | (10.5,46.5)
User.6: DESIGN FILES COPYRIGHT RASPBERRY PI 2020
User.7: NONE | DRAWING / MFR. DETAILS | NOTE: | ADJUST MICROSTRIP USB | TRACES FOR 90R +/- 15% | BOARD HAS CASTELLATED | EDGE PINS | AREA FOR MANUF./UL CODES | PLACE ON BOTTOM IN LEGEND
User.8: FIGURE | FINISHED_SIZE | 1.05x0.65 | 1.4x0.7 | SLOT HOLES: TOP to BOTTOM | ALL UNITS ARE IN MILLIMETERS | ROTATION | 90.000 | PLATED | QTY | 2
User.9: FIGURE | FINISHED_SIZE | 0.25 | 1.0 | 2.1 | DRILL CHART: TOP to BOTTOM | ALL UNITS ARE IN MILLIMETERS | ROTATION | - | PLATED | NON-PLATED | QTY | 111 | 86 | 4
